# Altium PCB TK518_P18V-PSU.PcbDoc
Units mm, origin at the board's own origin, x right, y up, seen from the top; angles counter-clockwise.
Board outline 77.5 x 82.75 mm, 4 copper layers (TopLayer, InternalPlane1, InternalPlane2, BottomLayer); 11 components, 9 nets, 61 pads, 0 vias.
Unrouted connection lines stored in the file: 20.
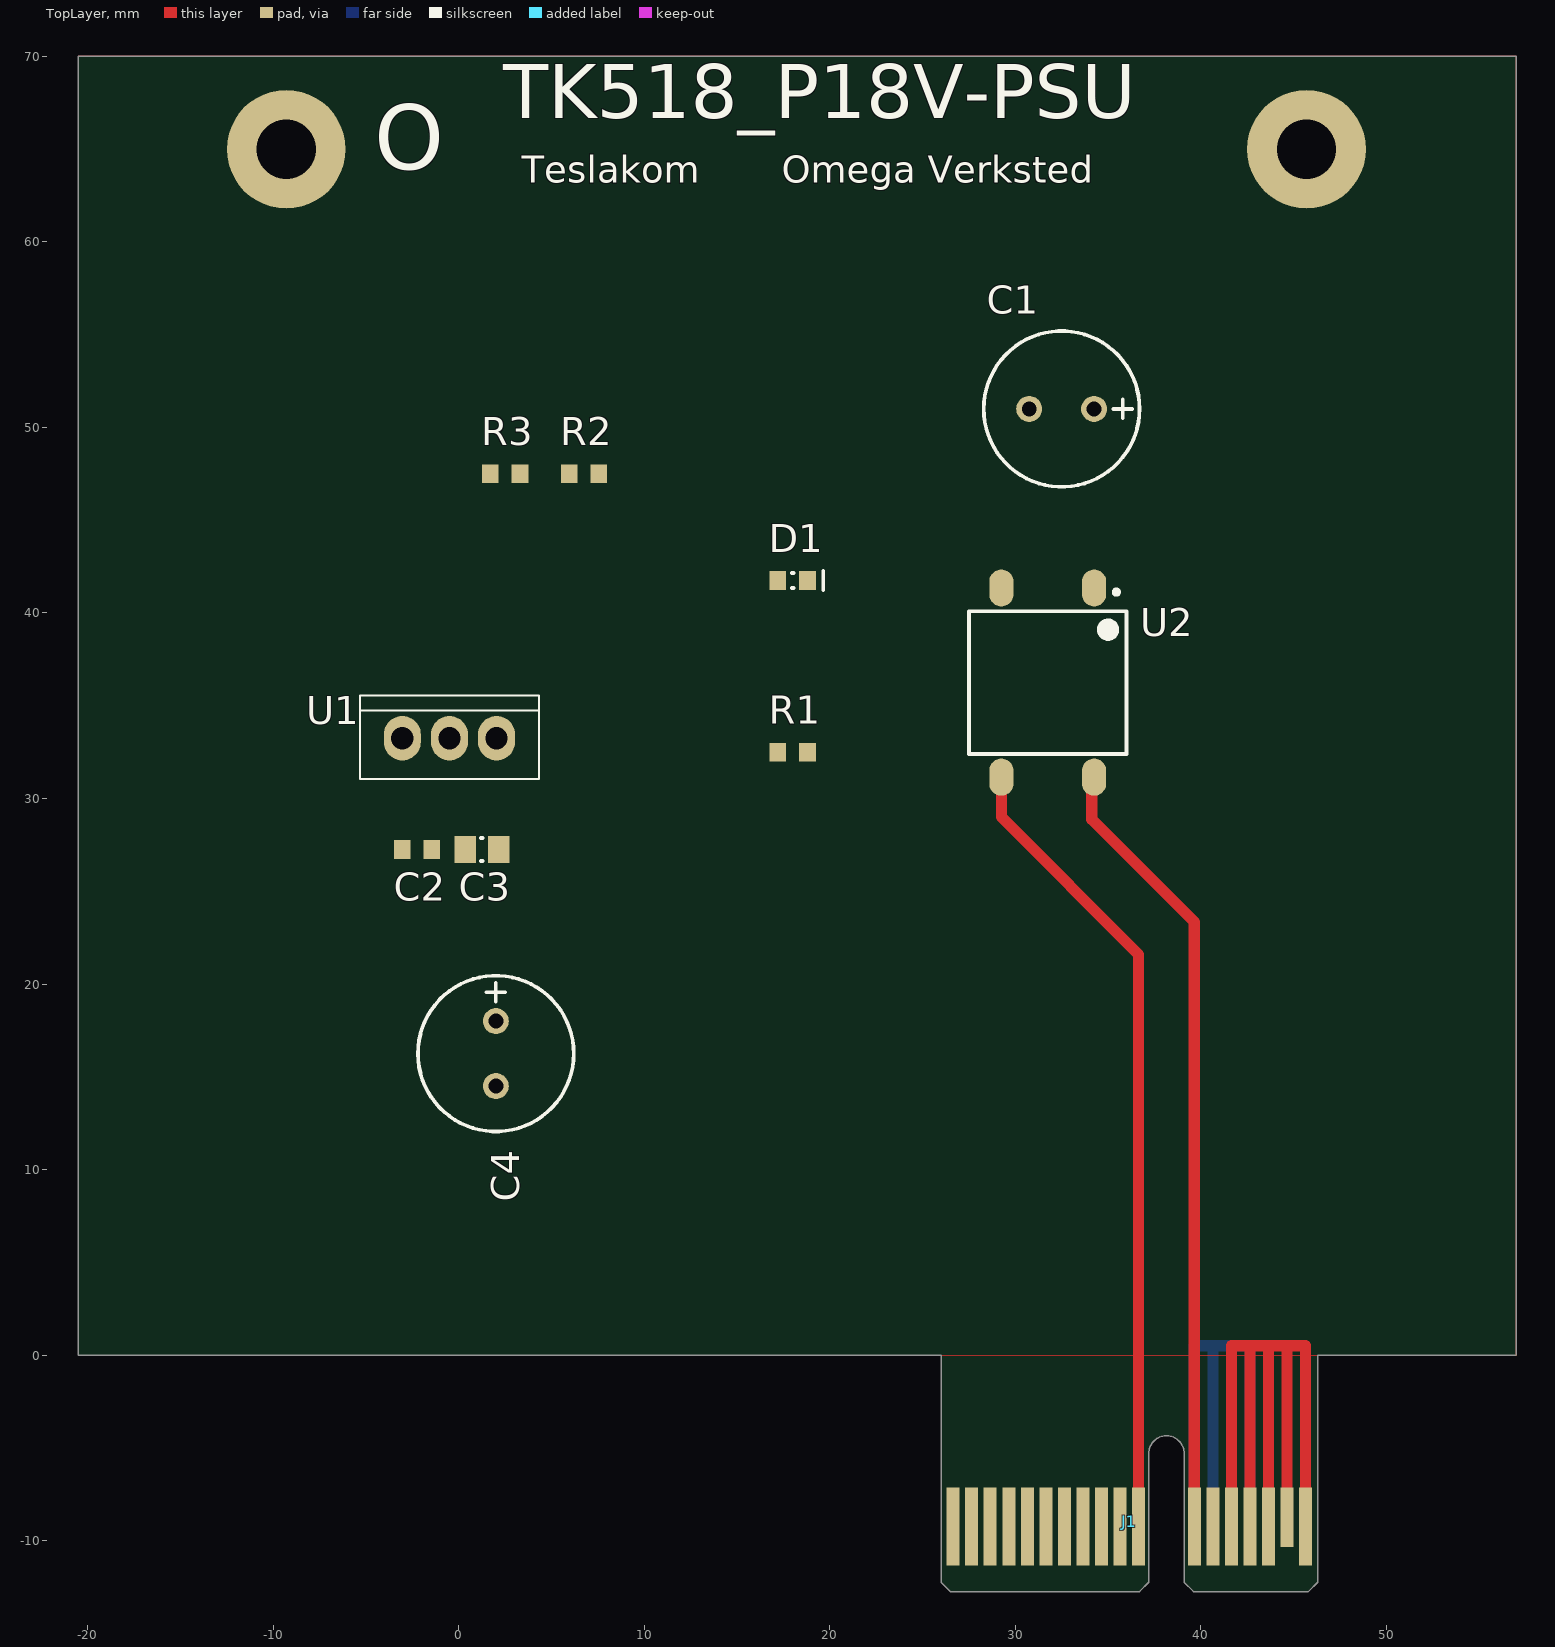
[diagram p0: TopLayer view]
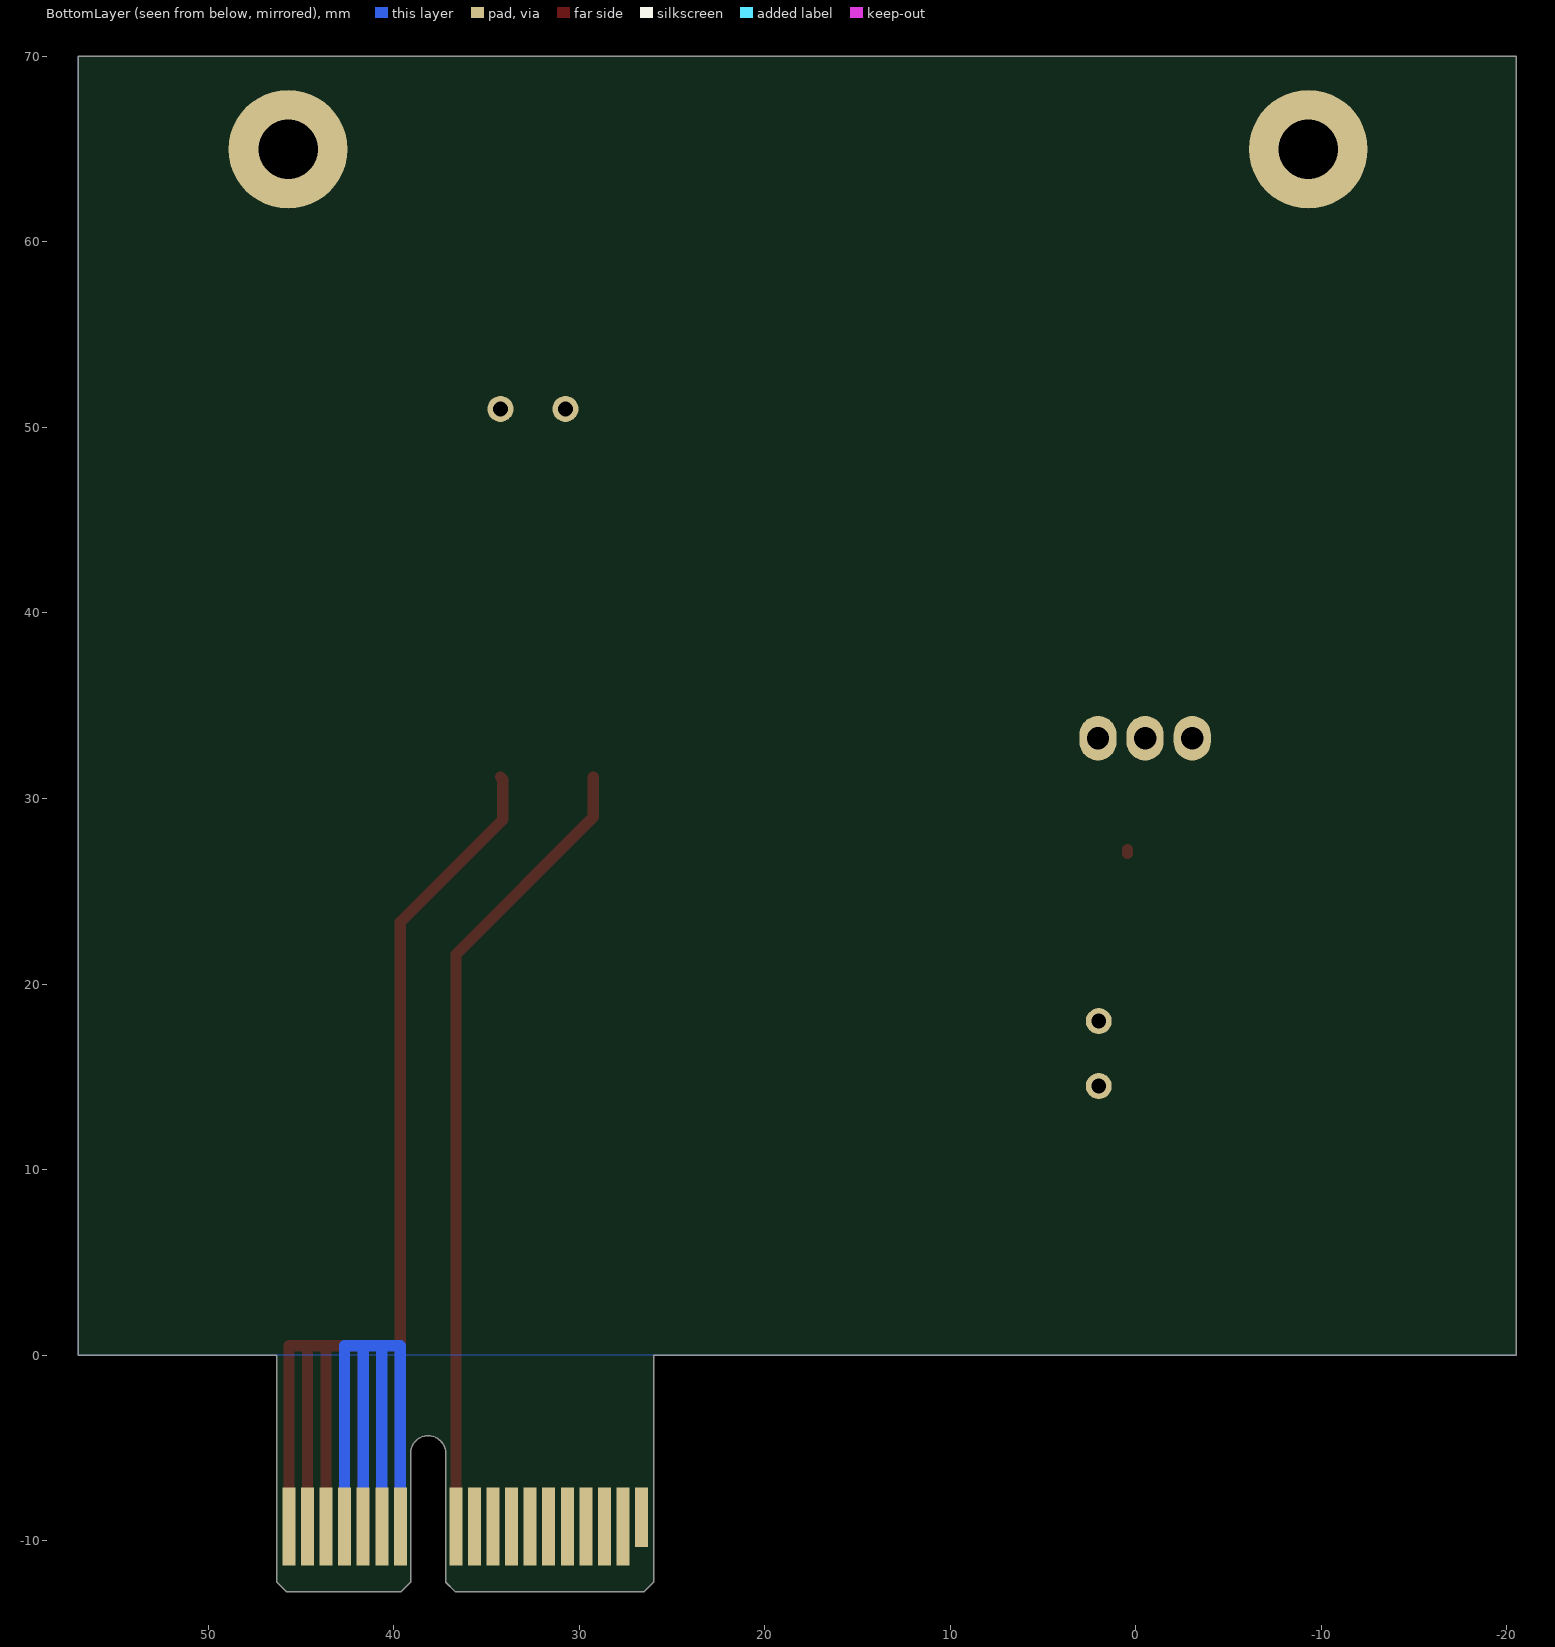
[diagram p1: BottomLayer view, seen from below]
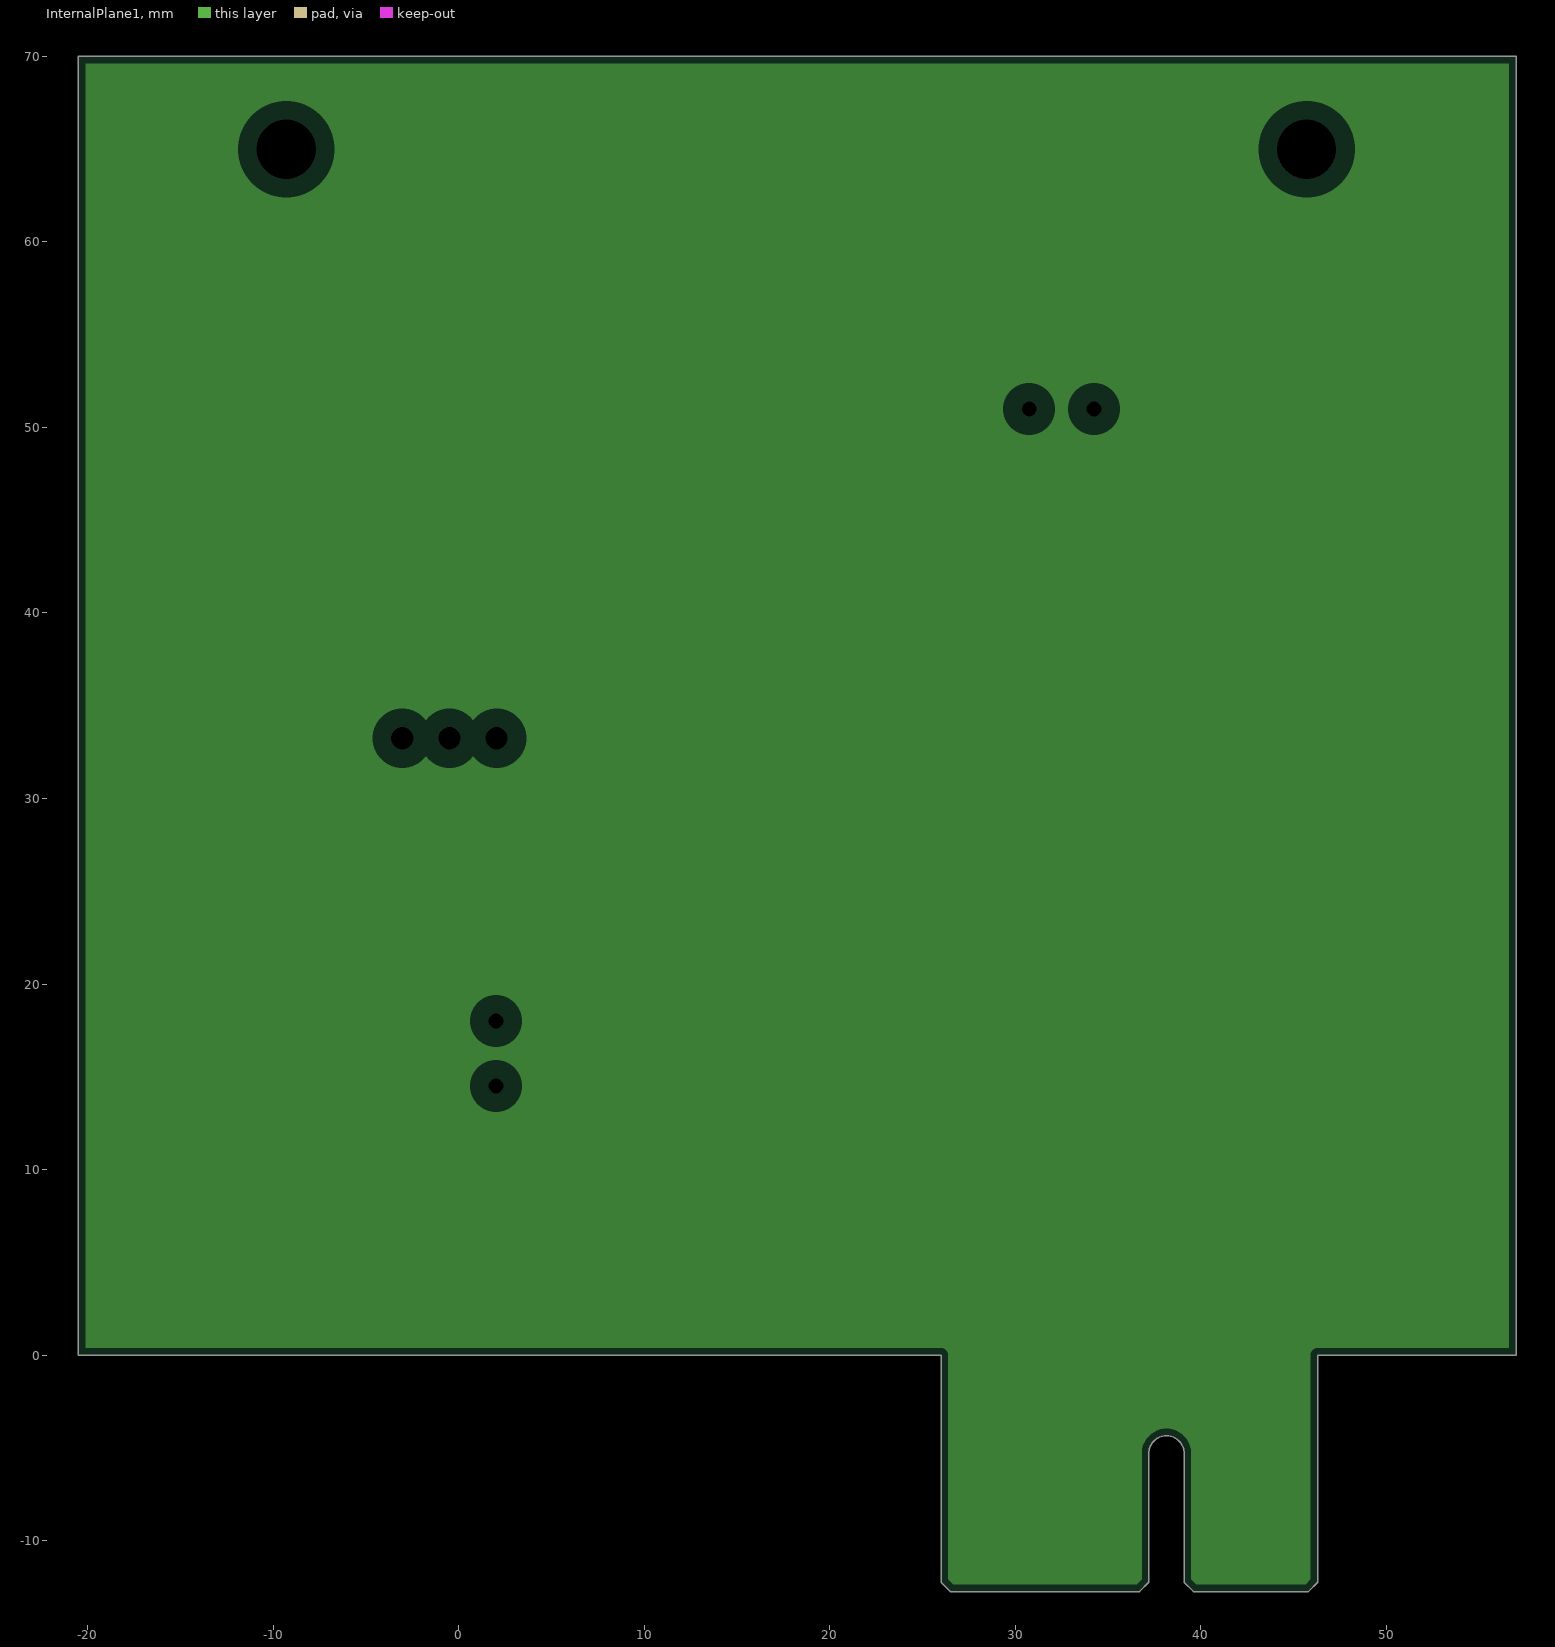
[diagram p2: InternalPlane1, clearances drawn from the general rule]
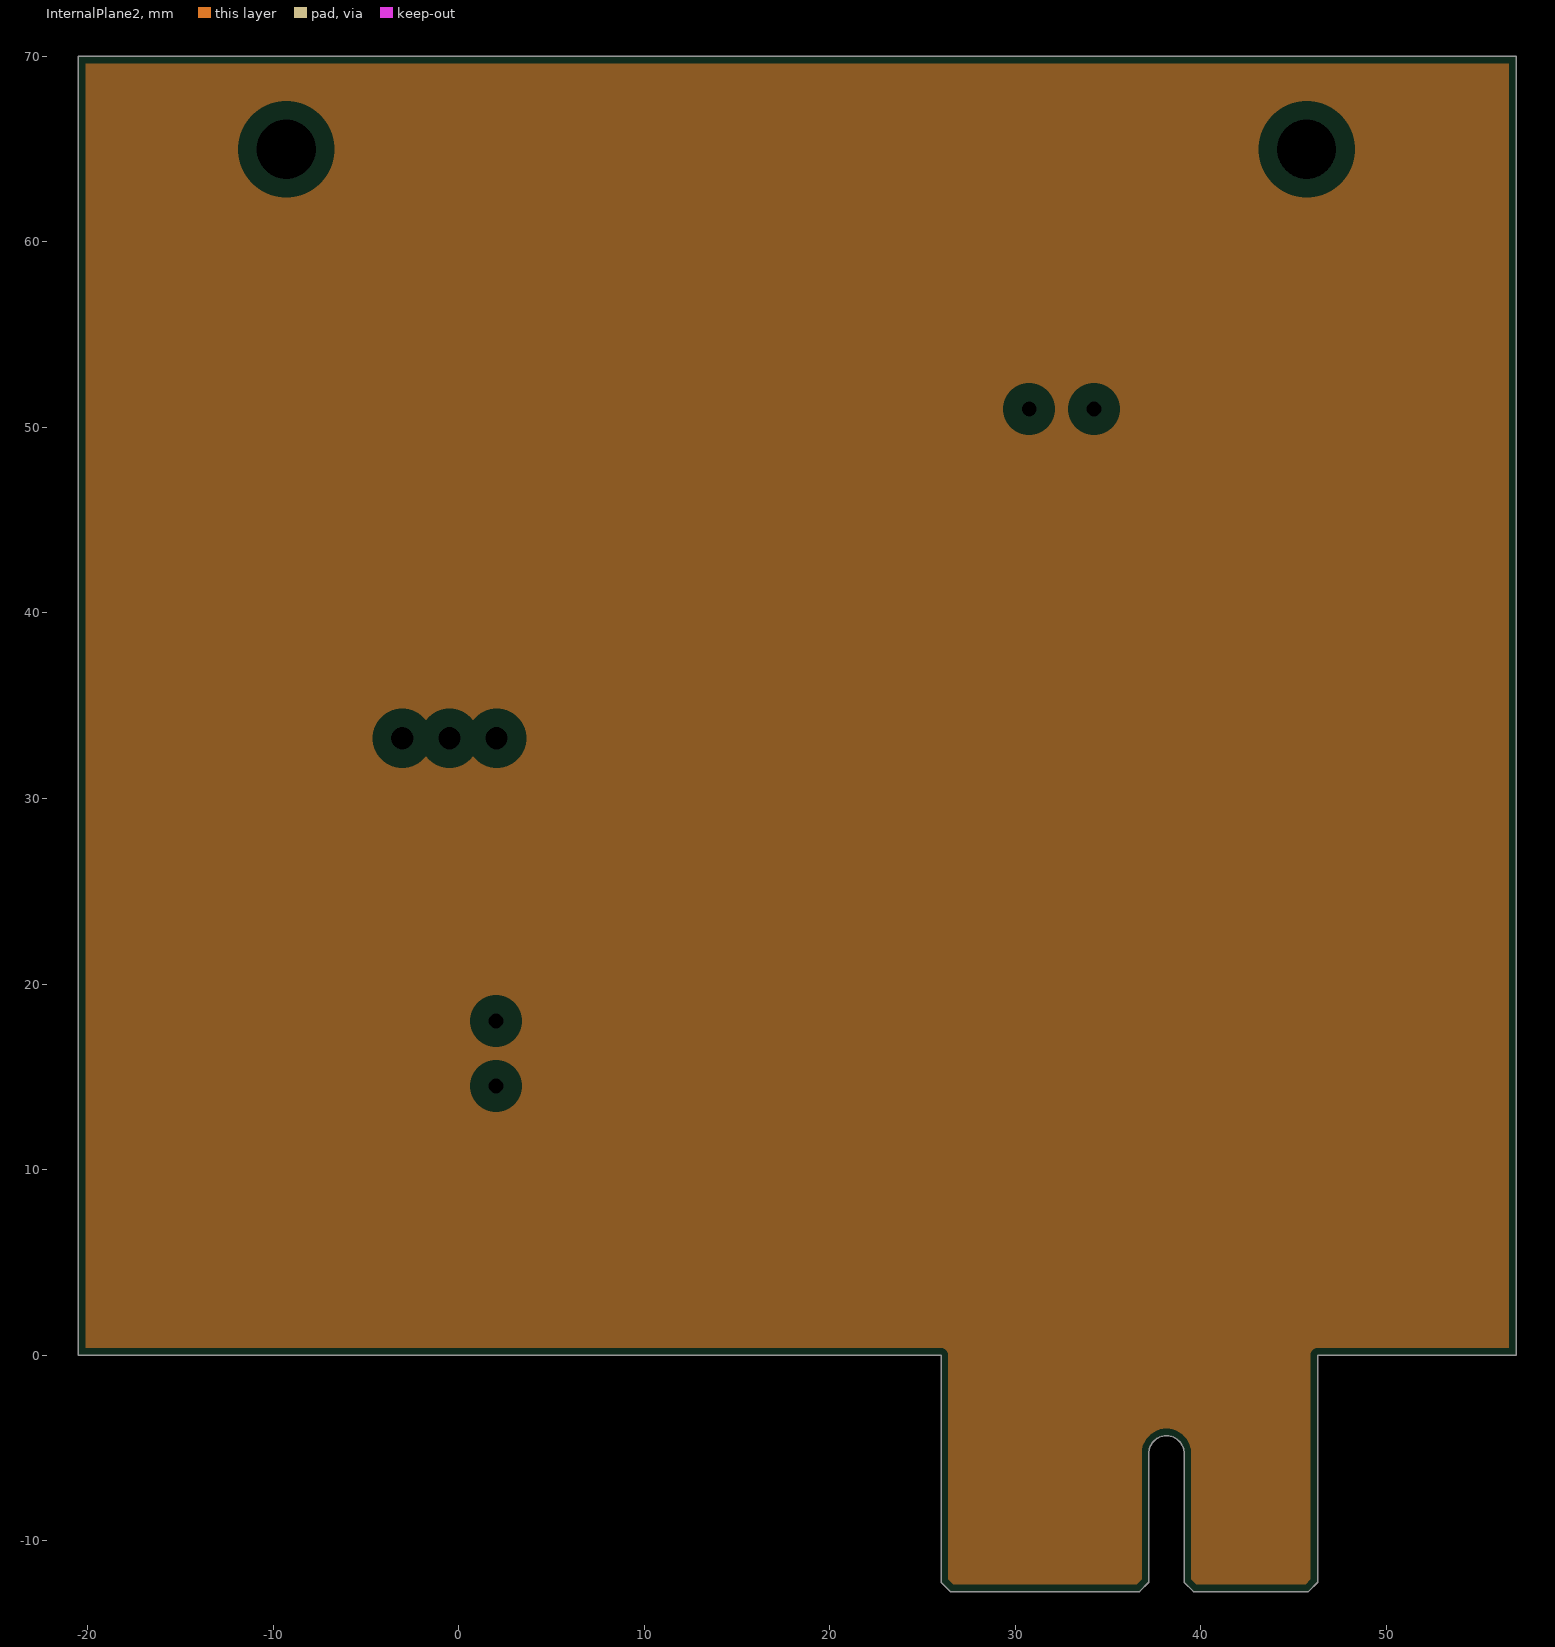
[diagram p3: InternalPlane2, clearances drawn from the general rule]

## Layer stack, top to bottom
TopSolder: solder mask 0.0102, Solder Resist, Dk 3.5
TopLayer: signal copper 0.0178
Dielectric1: core 0.32, FR-4, Dk 4.8
InternalPlane1: plane copper 0.0356
Dielectric2: prepreg 0.32, FR-4, Dk 4.8
InternalPlane2: plane copper 0.0356
Dielectric3: core 0.32, FR-4, Dk 4.8
BottomLayer: signal copper 0.0178
BottomSolder: solder mask 0.0102, Solder Resist, Dk 3.5

## Board outline
-20.5,0 14.35,0 26,0 26,-12.25 26.5,-12.75 36.7,-12.75 37.2,-12.25 37.2,-5.3 cw(c38.15,-5.3) 39.1,-5.3 39.1,-12.25 39.6,-12.75 45.8,-12.75 46.3,-12.25 46.3,0 57,0 57,70 -20.5,70

## Design rules (kind name [scope] priority, off if disabled: settings)
Clearance [All] p1: gap=0.16 except(0: Arc-Text Track-Text SMDPad-Text THPad-Text Via-Text Fill-Text Poly-Text Region-Text Text-Text)
Height [All] p1: minheight=0 maxheight=200 prefheight=12.7
HoleSize [All] p1: absolutevalues=TRUE maxlimit=6.35 minlimit=0.3 maxpercent=80.000 minpercent=20.000
MinimumSolderMaskSliver [All] p1: minsoldermaskwidth=0.1
PlaneClearance [All] p1: clearance=1
PlaneConnect [All] p1: planeconnectstyle=Relief reliefexpansion=0.508 reliefentries=4 reliefconductorwidth=1 reliefairgap=0.254
PolygonConnect [All] p1: connectstyle=Relief reliefconductorwidth=0.4 reliefentries=4 polygonreliefangle="90 Angle" airgapwidth=0.2
RoomDefinition "No components_2" [All] p1: confinementstyle=ConfineOut formatcopy=TRUE lockcomponents=FALSE outline 46.3,0 26,0 26,-7 46.3,-7
RoomDefinition "No components_1" [All] p2: confinementstyle=ConfineOut formatcopy=TRUE lockcomponents=FALSE outline 55.7,0 50.7,0 50.7,60 40.7,60 40.7,70 55.7,70 55.7,0
RoomDefinition "No components" [All] p3: confinementstyle=ConfineOut formatcopy=TRUE lockcomponents=FALSE outline -19.3,70 -19.3,0 -14.3,0 -14.3,60 -4.3,60 -4.3,70 -19.3,70
RoutingVias [All] p1: holewidth=0.711 width=1.27 viastyle="Through Hole" minholewidth=0.711 minwidth=1.27 maxholewidth=0.711 maxwidth=1.27
SilkToSolderMaskClearance [IsPad] p1: minsilkscreentomaskgap=0.178 clearancetoexposedcopper=TRUE
SolderMaskExpansion [All] p1: expansion=0.102
Width [All] p1: maxlimit=10 minlimit=0.16 preferedwidth=0.4
24 further rules are at their usual default settings.

## Components (designator, comment, footprint, x,y, rotation, side; value= is the part's Value field where it differs from the comment)
C1 "330uF" CAPPR35D08H16 30.75,51 r0 top
C2 "100nF" CAPC0603(1608)55_N -2.25,27.25 r180 top
C3 "1uF" CAPC0805(2012)100_N 1.25,27.25 r0 top
C4 "330uF" CAPPR35D08H16 2,14.5 r90 top
D1 "SMD LED Red" I_LEDC0603(1608)_N 18,41.75 r0 top
J1 "PCI_Express-36P" PCIeX1-GF-2D-1000-1K-O36 36.15,-9.25 r0 top
R1 "560R" RESC0603(1608)_N 18,32.5 r0 top
R2 "11k" RESC0603(1608)_N 6.75,47.5 r0 top
R3 "150k" RESC0603(1608)_N 2.5,47.5 r0 top
U1 "LM317T" TO-220-3P -0.5,33.25 r180 top
U2 "Full bridge rectifier" SOP500P1010X260-4N 31.75,36.25 r270 top

## Footprints (in the part's own frame and the unit in brackets; to place one, negate y for a bottom-side part, rotate by r counter-clockwise, add the part's x,y. Pads: shape width x height; smd on the part's side, far side on the other; paste and mask are expansions set on the pad)
CAPC0603(1608)55_N [mm] "Chip Capacitor, Body 1.6x0.8mm, Height 0.55mm, IPC Medium Density"
  rect 0.9x1 smd: 1(-0.8,0) 2(0.8,0)
  body extent -0.87,-0.48 0.88,0.47, height 0.55
CAPC0805(2012)100_N [mm] "Chip Capacitor, Body 2.0x1.2mm, Height 1.0mm, IPC Medium Density"
  rect 1.15x1.45 smd: 1(-0.9,0) 2(0.9,0)
  silkscreen extent -0.05,-0.62 0.05,0.63, body extent -1.1,-0.72 1.1,0.73, height 1
CAPPR35D08H16 [mm] "D=8mm, Pitch=3.5mm, H=16mm"
  round 1.4 hole 0.8: 1(0,0) 2(3.5,0)
  silkscreen extent -2.45,-4.2 5.95,4.2, body extent -2.25,-4 5.75,4, height 16
I_LEDC0603(1608)_N [mm] "Chip Resistor, Body 1.6x0.8mm, IPC Medium Density"
  rect 0.9x1 smd: 1(-0.8,0) 2(0.8,0)
  silkscreen extent -0.05,-0.51 1.65,0.51, body extent -0.85,-0.45 0.85,0.45, height 0.9
PCIeX1-GF-2D-1000-1K-O36 [mm] "Golden finger, PCIeX1, Dual, Opposite, Pitch 1mm, 36-Position"
  rect 0.7x3.2 smd far side paste-1: A1(-9.5,0.5)
  rect 0.7x4.2 smd far side paste-1: A2(-8.5,0) A3(-7.5,0) A4(-6.5,0) A5(-5.5,0) A6(-4.5,0) A7(-3.5,0) A8(-2.5,0) A9(-1.5,0) A10(-0.5,0) A11(0.5,0) A12(3.5,0) A13(4.5,0) A14(5.5,0) A15(6.5,0) A16(7.5,0) A17(8.5,0) A18(9.5,0)
  rect 0.7x4.2 smd paste-1: B1(-9.5,0) B2(-8.5,0) B3(-7.5,0) B4(-6.5,0) B5(-5.5,0) B6(-4.5,0) B7(-3.5,0) B8(-2.5,0) B9(-1.5,0) B10(-0.5,0) B11(0.5,0) B12(3.5,0) B13(4.5,0) B14(5.5,0) B15(6.5,0) B16(7.5,0) B18(9.5,0)
  rect 0.7x3.2 smd paste-1: B17(8.5,0.5)
RESC0603(1608)_N [mm] "Chip Resistor, Body 1.6x0.8mm, IPC Medium Density"
  rect 0.9x1 smd: 1(-0.8,0) 2(0.8,0)
  body extent -0.85,-0.47 0.85,0.47, height 0.6
SOP500P1010X260-4N [mm] "SOP, 4-Leads, Body 8,32x8,35mm, Pitch 5,00mm, IPC Medium Density"
  oval 2x1.3 smd: 1(-5.1,2.5) 2(-5.1,-2.5) 3(5.1,-2.5) 4(5.1,2.5)
  silkscreen extent -5,-4.25 3.85,4.25, body extent -4.25,-4.25 4.25,4.25, height 2.6
TO-220-3P [mm]
  oval 2x2.4 hole 1.2 unplated: 1(2.54,0) 2(0,0) 3(-2.54,0)
  silkscreen extent -4.83,-2.3 4.83,2.2, body extent -4.83,-2.3 4.83,2.2, height 19.3

## Part data
C1 C4: library part 3891, "25V elektrolytt"
C2: library part 3028, "X7R 50V 5%"
C3: library part 3582, "X7R 50V 10%"
D1: library part 2209
J1: library part 3177, "PCI express PCB kortkankonnektor"
R1: library part 3435, "0.1W 1% Thick film resistor"
R2: library part 3465, "0.1W 1% Thick film resistor"
R3: library part 3493, "0.1W 1% Thick film resistor"
U1: "Adjustable Regulator"
U2: library part "DBLS07G Rectifier"

## Free pads (board coordinates)
  round 6.4 hole 3.2 unplated: 0(-9.3,65) 0(45.7,65)

## Nets (pads, with @x,y where several pads share a name; then routed paths per layer and width w, separated by ;. In a path a pad name is that pad's centre, name@x,y a point inside that pad or via, vN(x,y) a via of type N, cw(c..) or ccw(c..) an arc to the next point about the centre after c; other vN are vias at no path point)
AC_S7_L1: J1.B11 U2.3 | length 43.5
  TopLayer w0.6: U2.3 29.25,29 36.65,21.6 J1.B11
AC_S7_L2: J1.B12 U2.4 | length 42.7
  TopLayer w0.6: U2.4 34.125,31.025 34.125,28.875 39.65,23.35 J1.B12
GND: C1.1 C2.1 C3.1 C4.1 J1.A12 J1.A13 J1.A14 J1.A15 J1.B1 J1.B14 J1.B15 J1.B16 J1.B17 J1.B18 R1.1 R3.1 U2.2 | length 94.5
  TopLayer w0.6: C3.1@0.45,27.05 C3.1@0.45,27.25 ; J1.B14 41.65,0.5 42.65,0.5 ; J1.B15 42.65,0.5 ; J1.B16 43.65,0.5 ; J1.B17 44.65,0.45 44.7,0.5 ; J1.B18 45.65,0.5 44.7,0.5 ; 42.65,0.5 43.65,0.5 ; 43.65,0.5 44.7,0.5
  BottomLayer w0.6: J1.A12 39.65,0.5 40.65,0.5 ; J1.A13 40.65,0.5 ; J1.A14 41.65,0.5 ; J1.A15 42.65,0.5 41.65,0.5 ; 40.65,0.5 41.65,0.5
NetC1_2: C1.2 C2.2 U1.3 U2.1
NetD1_2: D1.2 R1.2
NetR2_1: R2.1 R3.2 U1.1
VCC_EXTRA: J1.A16
VCC_P5V0: J1.A17 J1.B2 J1.B3 J1.B4 J1.B5 J1.B6 J1.B7 J1.B8 J1.B9
VCC_P18V: C3.2 C4.2 D1.1 J1.A18 R2.2 U1.2
pads on no net: J1.A1 J1.A2 J1.A3 J1.A4 J1.A5 J1.A6 J1.A7 J1.A8 J1.A9 J1.A10 J1.A11 J1.B10 J1.B13

## Polygon pours and split planes (outlines as drawn)
GND on BottomLayer "Bottom layer GND" (solid, shelved, pour order 4): -20.5,70 -20.5,0 57,0 57,70
GND on TopLayer "Top layer GND" (solid, remove dead copper, shelved, pour order 8): -20.5,70 -20.5,0 57,0 57,70
no net on InternalPlane1 (split plane): 56.617,0.383 46.3,0.383 46.225,0.375 46.153,0.354 46.087,0.318 46.029,0.271 45.982,0.213 45.946,0.147 45.925,0.075 45.917,0 45.917,-12.091 45.641,-12.367 39.759,-12.367 39.483,-12.091 39.483,-5.3 39.475,-5.151 39.45,-5.003 39.408,-4.86 39.351,-4.722 39.279,-4.591 39.192,-4.469 39.093,-4.357 38.981,-4.258 38.859,-4.171 38.728,-4.099 38.59,-4.042 38.447,-4 38.299,-3.975 38.15,-3.967 38.001,-3.975 37.853,-4 37.71,-4.042 37.572,-4.099 37.441,-4.171 37.319,-4.258 37.207,-4.357 37.108,-4.469 37.021,-4.591 36.949,-4.722 36.892,-4.86 36.85,-5.003 36.825,-5.151 36.817,-5.3 36.817,-12.091 36.541,-12.367 26.659,-12.367 26.383,-12.091 26.383,0 26.375,0.075 26.354,0.147 26.318,0.213 26.271,0.271 26.213,0.318 26.146,0.354 26.075,0.375 26,0.383 14.35,0.383 -20.117,0.383 -20.117,69.617 56.617,69.617
no net on InternalPlane2 (split plane): 56.617,0.383 46.3,0.383 46.225,0.375 46.153,0.354 46.087,0.318 46.029,0.271 45.982,0.213 45.946,0.147 45.925,0.075 45.917,0 45.917,-12.091 45.641,-12.367 39.759,-12.367 39.483,-12.091 39.483,-5.3 39.475,-5.151 39.45,-5.003 39.408,-4.86 39.351,-4.722 39.279,-4.591 39.192,-4.469 39.093,-4.357 38.981,-4.258 38.859,-4.171 38.728,-4.099 38.59,-4.042 38.447,-4 38.299,-3.975 38.15,-3.967 38.001,-3.975 37.853,-4 37.71,-4.042 37.572,-4.099 37.441,-4.171 37.319,-4.258 37.207,-4.357 37.108,-4.469 37.021,-4.591 36.949,-4.722 36.892,-4.86 36.85,-5.003 36.825,-5.151 36.817,-5.3 36.817,-12.091 36.541,-12.367 26.659,-12.367 26.383,-12.091 26.383,0 26.375,0.075 26.354,0.147 26.318,0.213 26.271,0.271 26.213,0.318 26.146,0.354 26.075,0.375 26,0.383 14.35,0.383 -20.117,0.383 -20.117,69.617 56.617,69.617

## Silkscreen, mask and mechanical layers (free items; w line width, h text height)
TopOverlay:
  text "TK518_P18V-PSU" at 2.4,65.7 h5
  text "O" at -4.55,62.75 h6
  text "Teslakom" at 3.4,62.7 h2.5
  text "Omega Verksted" at 17.4,62.7 h2.5
BottomOverlay:
  text "T" at 38.75,5.25 h60
PCI-SIG Outline:
  lines w0.1: 46.3,0 46.3,-12.25 45.8,-12.75 39.6,-12.75 39.1,-12.25 39.1,-5.3 ccw(c38.15,-5.3) 37.2,-5.3 37.2,-12.25 36.7,-12.75 26.5,-12.75 26,-12.25 26,0 -4.95,0 -20.55,0 -20.55,70 56.95,70 56.95,0 46.3,0 ; -19.3,70 -19.3,70
DrillDrawing:
  text ".LEGEND" at 206.25,46.602 h1
  text "Drilling Details." at 206.25,44.773 h1